# Altium PCB Volta-Interface.PcbDoc (part 2 of 2)
Units mil, origin at the board's own origin, x right, y up, seen from the top; angles counter-clockwise.
Board outline 3346.46 x 1023.62 mil, 2 copper layers (Component Side, Bottom Layer), stack 42.17 mil thick; 48 components, 34 nets, 179 pads, 58 vias.
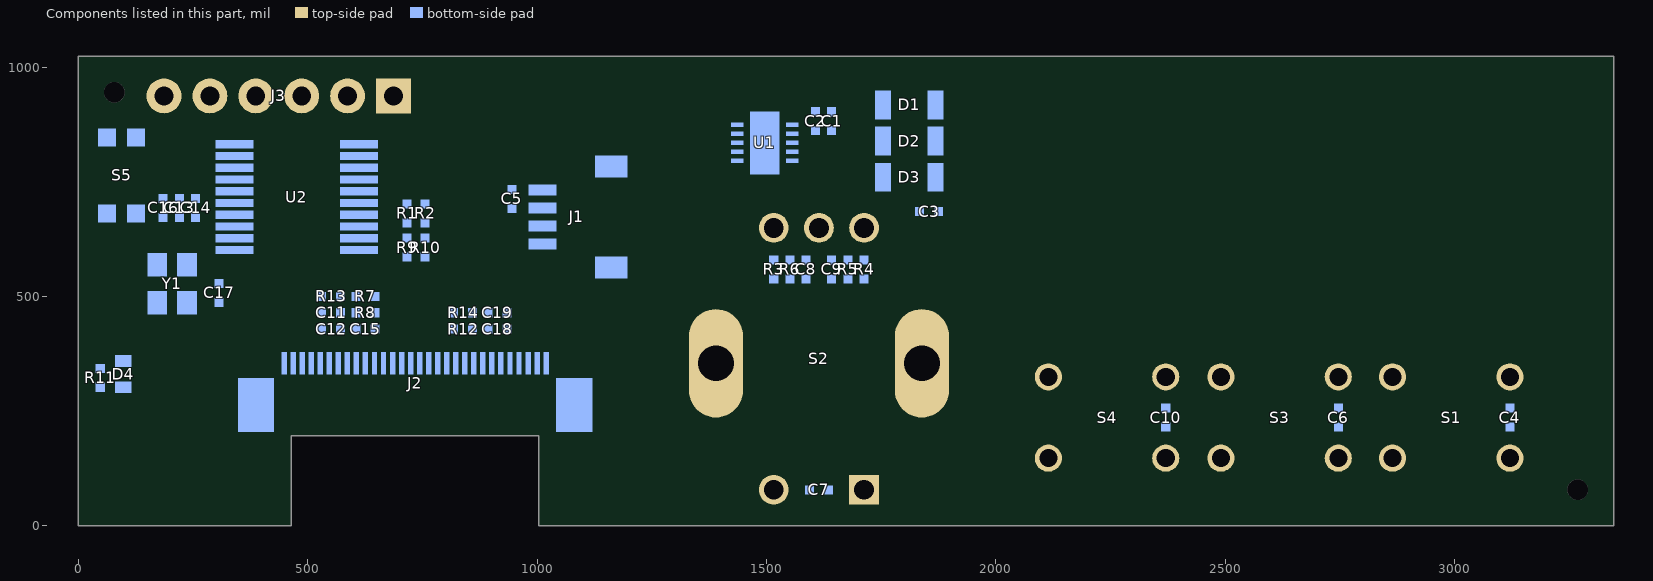
[diagram p2: the components of this part, seen from the top]

## Silkscreen, mask and mechanical layers (free items; w line width, h text height) (continued)
PCB_SHEET2:
  lines w7.8: -12883.55,11130.22 -6595.55,11130.22 ; -12883.55,11330.22 -6595.55,11330.22 ; -11580.55,11135.22 -11580.34,11550.13 ; -10295.55,11115.22 -10295.55,11550.22 ; -7095.55,10905.22 -7095.55,11550.22 ; -13888.98,-9942 -13888.98,12050.22 ; -13888.98,-9942 20104.45,-9942 ; -13888.98,-9942 20104.45,-9942 ; -13888.98,-9942 -13888.98,12050.22 ; -13888.98,12050.22 20104.45,12050.22 ; -13888.98,12050.22 20104.45,12050.22 ; 20104.45,-9942 20104.45,12050.22 ; 20104.45,-9942 20104.45,12050.22
  lines w23.6: -13646.14,-4199.9 -12896.14,-4199.9 ; -13646.14,6550.06 -12896.14,6550.06 ; -12896.15,11550.02 -12896.15,-9449.87 ; -12896.14,-8699.88 -7776.15,-8699.88 ; -12305.15,-9199.88 -12305.15,-8699.88 ; -11146.16,-9449.87 -11146.16,-9199.88 ; -9646.16,-9824.87 -9646.16,-9449.87 ; -7776.17,-9444.78 -7776.17,-8714.87 ; -6600.34,10880.22 -6600.34,11550.13 ; -5396.17,-9824.87 -5396.17,-9449.87 ; -5396.17,11550.02 -5396.17,11925.02 ; -1146.18,-9824.87 -1146.18,-9449.87 ; -1146.18,11550.02 -1146.18,11925.02 ; 7353.81,-9824.87 7353.81,-9449.87 ; 7353.81,11550.02 7353.81,11925.02 ; 11603.8,-9824.87 11603.8,-9449.87 ; 15853.79,-9824.87 15853.79,-9449.87 ; 15853.79,11550.02 15853.79,11925.02 ; 19103.79,6550.06 19853.79,6550.06 ; 19103.79,11550.13 -12896.66,11550.13 ; 19128.79,-4199.9 19878.79,-4199.9 ; -12896.66,11550.13 -12896.66,10743.95 -12896.66,11550.13 ; -12896.15,-9449.87 19103.79,-9449.87 ; -12896.15,-9449.87 19103.79,-9449.87 ; -12896.15,-9449.87 19103.79,-9449.87 ; -12896.15,-9449.87 19103.79,-9449.87 ; -12896.14,-9199.88 -7776.15,-9199.88 ; -12896.14,-9199.88 -7776.15,-9199.88 ; -12896.14,-9199.88 -7776.15,-9199.88 ; -12896.14,-9199.88 -7776.15,-9199.88 ; -10046.15,11550.02 -10046.15,11930.03 ; -10046.15,11550.02 -10046.15,11930.03 ; -10046.15,11550.02 -10046.15,11930.03 ; -10046.15,11550.02 -10046.15,11930.03 ; -10046.15,11550.02 -10046.15,11930.03 ; -10046.15,11550.02 -10046.15,11930.03 ; -10046.15,11550.02 -10046.15,11930.03 ; -10046.15,11550.02 -10046.15,11930.03 ; -10046.15,11930.03 -6599.55,11930.03 ; -10046.15,11930.03 -6796.15,11930.03 -10046.15,11930.03 ; -10046.15,11930.03 -6599.55,11930.03 ; -9546.15,11550.02 -9546.15,11930.03 ; -9546.15,11550.02 -9546.15,11930.03 ; -9546.15,11550.02 -9546.15,11930.03 ; -9546.15,11550.02 -9546.15,11930.03 ; -6599.55,11930.03 -6599.55,11550.02 -6599.55,11930.03 ; 11603.8,11550.02 11603.8,11925.02 ; 11603.8,11550.02 11603.8,11925.02 ; 11603.8,11550.02 11603.8,11925.02 ; 11603.8,11550.02 11603.8,11925.02 ; 19103.79,-9449.87 19103.79,11242.06 19103.79,-9449.87 ; 19103.79,-9449.87 19103.79,11550.02 ; 19103.79,-9449.87 19103.79,11550.02 ; 19103.79,-9449.87 19103.79,11550.02 ; -13296.15,1020.08 -13296.15,1080.08 -13096.15,1080.08 -13096.15,1150.08 -12896.15,1050.08 -13096.15,950.08 -13096.15,1020.08 -13296.15,1020.08 ; 3003.83,-9649.87 3103.82,-9449.87 3203.82,-9649.87 3133.83,-9649.87 3133.83,-9849.87 3073.82,-9849.87 3073.82,-9649.87 3003.83,-9649.87 ; 3003.83,11750.02 3103.82,11550.02 3203.82,11750.02 3133.82,11750.02 3133.82,11950.02 3073.82,11950.02 3073.82,11750.02 3003.83,11750.02 ; 19103.79,1050.08 19303.79,950.08 19303.79,1020.08 19503.79,1020.09 19503.79,1080.08 19303.79,1080.08 19303.79,1150.08 19103.79,1050.08
  text "SH" at -9578.74,11808.37 h100
  text "DWG NO" at -6619.98,11792.06 h100
  text ".DocNumberPCB" at -7275.55,11680.22 h120
  text "8" at -11269.09,11661.01 h200
  text "4" at 5437.93,11661.01 h200
  text "2" at 13944.73,11661.01 h200
  text "6" at -3063.9,11654.72 h200
  text "5" at 1185.99,11654.72 h200
  text "3" at 9693,11654.72 h200
  text "3" at 9693,11654.72 h200
  text "1" at 18185.99,11654.72 h200
  text "1" at -9775.55,11640.22 h120
  text "REVISION HISTORY" at -7655.55,11389.11 h100
  text "APPROVED" at -11995.55,11150.22 h100
  text "DATE" at -10795.55,11150.22 h100
  text "DESCRIPTION" at -8495.55,11150.22 h100
  text "REV" at -6695.55,11150.22 h100
  text "SEE SHEET 1" at -7195.55,10950.22 h100
  text "A" at -13161.18,9154.51 h200
  text "A" at 19842.23,9154.51 h200
  text "B" at -13159.2,3648.25 h200
  text "B" at 19844.21,3648.25 h200
  text "Scale  3:1" at 12481.6,-1620.49 h500
  text "C" at -13182.21,-1842.84 h200
  text "C" at 19821.2,-1842.84 h200
  text "D" at -13172.28,-7342.81 h200
  text "D" at 19831.12,-7342.81 h200
  text "REV" at -12410.98,-8891.95 h120
  text ".DocNumberPCB" at -8020.55,-9099.78 h200
  text ".Rev" at -12395.55,-9149.78 h200
  text "2" at -12395.55,-9349.78 h100
  text "SHEET 2 OF" at -11175.53,-9375.11 h100
  text "8" at -11485.55,-9789.78 h200
  text "1" at 18186.02,-9799.78 h200
  text "4" at 5437.93,-9838.9 h200
  text "2" at 13944.73,-9838.9 h200
  text "7" at -7314.82,-9845.19 h200
  text "6" at -3063.9,-9845.19 h200
  text "5" at 1185.99,-9845.19 h200
  text "3" at 9693,-9845.19 h200

## Dimensions
3346.46,0 to 0,0 on ASSY_TOP
0,1023.62 to 0,0 on ASSY_TOP

## Panel: embedded boards
"Volta-Interface.PcbDoc" at 5000,-1220.47, 1 rows x 1 columns, spacing 2500 x 1500, rotation 0

## Text inside footprints (layer, text, board x,y; h text height)
D1: Bottom Overlay "K" at 1709.65,899.61 h40
D2: Bottom Overlay "K" at 1709.65,820.87 h40
D3: Bottom Overlay "K" at 1709.65,742.13 h40
Y1: Bottom Overlay "o" at 122.72,418.56 h10 r270